# Altium PCB Breakout_12pin.PcbDoc
Units mm, origin at the board's own origin, x right, y up, seen from the top; angles counter-clockwise.
Board outline 55 x 25 mm, 2 copper layers (Top Layer, Bottom Layer), stack 1.571 mm thick; 7 components, 12 nets, 44 pads, 0 vias.
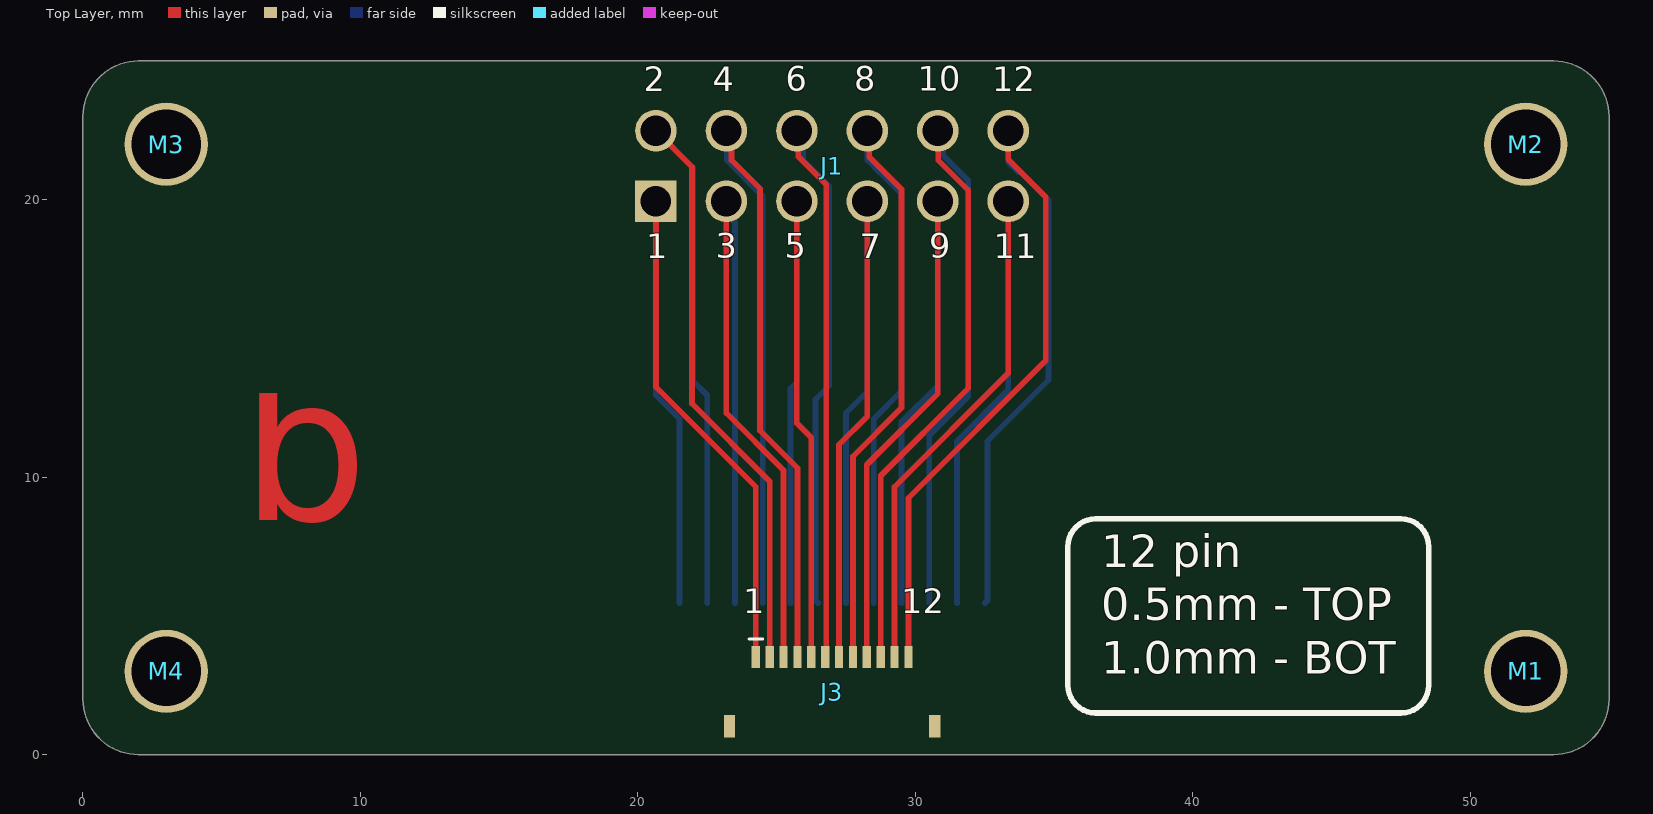
[diagram p0: Top Layer view]
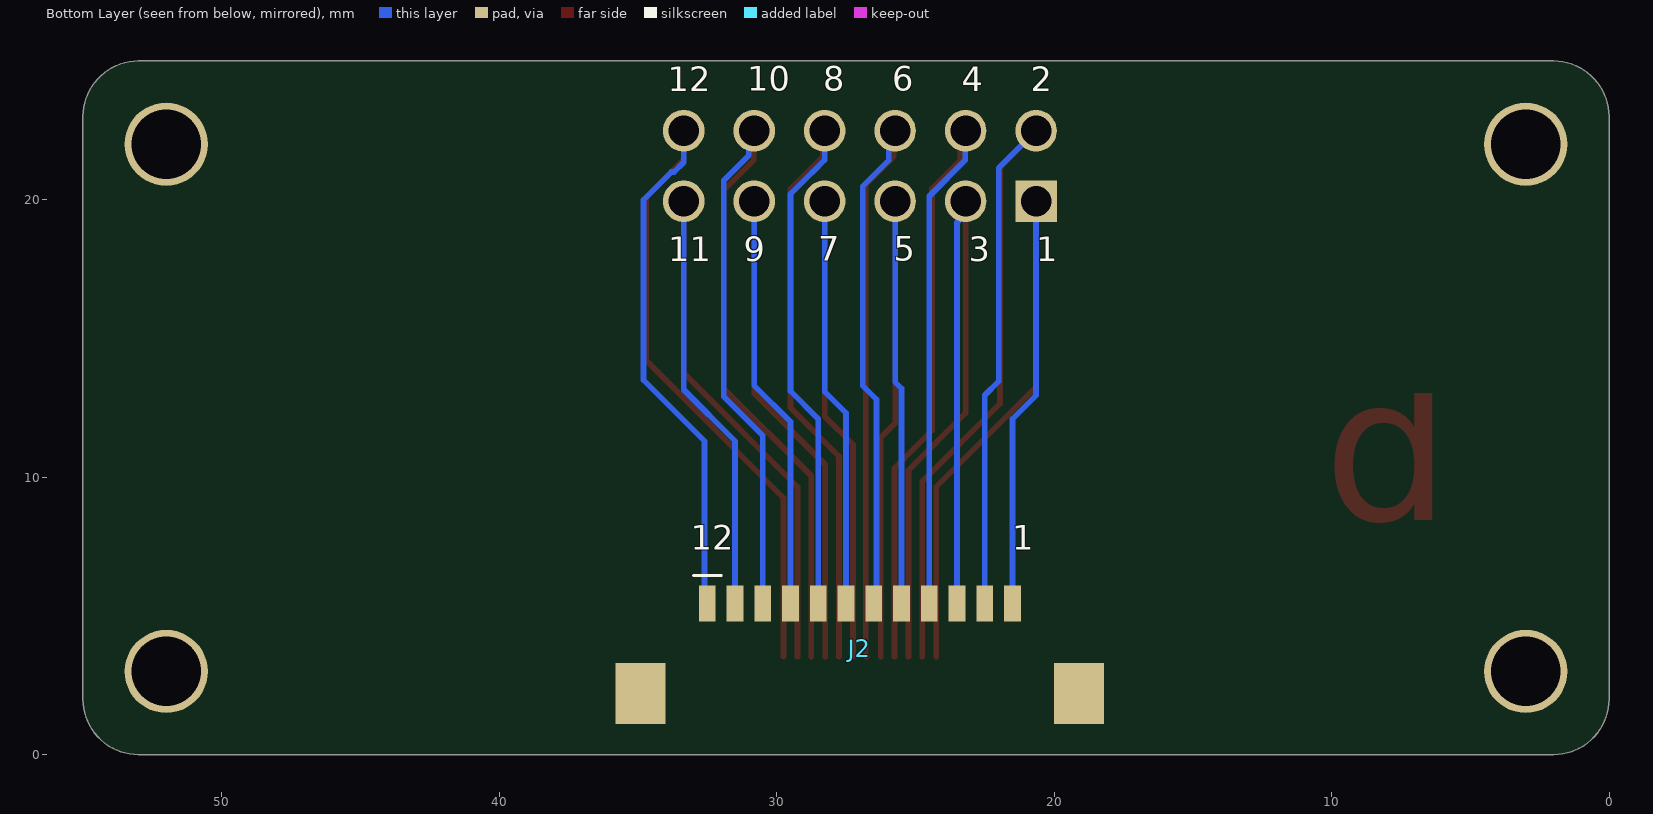
[diagram p1: Bottom Layer view, seen from below]

## Layer stack, top to bottom
Top Solder: solder mask 0.0102, Solder Resist, Dk 3.5
Top Layer: signal copper 0.0356
Dielectric 1: dielectric 1.5, FR-4, Dk 4.8
Bottom Layer: signal copper 0.0356
Bottom Solder: solder mask 0.0102, Solder Resist, Dk 3.5

## Board outline
2,0 cw(c2,2) 0,2 0,23 cw(c2,23) 2,25 53,25 cw(c53,23) 55,23 55,2 cw(c53,2) 53,0

## Design rules (kind name [scope] priority, off if disabled: settings)
Clearance [All] p1: gap=0.204 ignorepadtopadclearanceinfootprint=TRUE
DiffPairsRouting [All] p1: maxlimit=0.254 minlimit=0.064 mostfreqgap=0.127 toplayer_minwidth=0.178 toplayer_maxwidth=0.457 toplayer_prefwidth=0.457 bottomlayer_minwidth=0.178 bottomlayer_maxwidth=0.457 bottomlayer_prefwidth=0.457 impedanceprofiledriven=TRUE maxuncoupledlength=12.7
HoleSize [All] p1: absolutevalues=TRUE maxlimit=5 minlimit=0.153 maxpercent=80.000 minpercent=20.000
MinimumSolderMaskSliver [All] p1: minsoldermaskwidth=0.178
PolygonConnect [All] p1: connectstyle=Relief reliefconductorwidth=0.254 reliefentries=4 polygonreliefangle="90 Angle" airgapwidth=0.254
RoutingVias [All] p1: holewidth=0.305 width=0.61 viastyle="Through Hole" minholewidth=0.254 minwidth=0.508 maxholewidth=0.5 maxwidth=1.27
SolderMaskExpansion [All] p1: expansion=0.102 istentingtop=FALSE
Width [All] p1: maxlimit=25.4 minlimit=0.204 preferedwidth=0.254 minimp=50.000000 maximp=50.000000 favimp=50.000000
27 further rules are at their usual default settings.

## Components (designator, comment, footprint, x,y, rotation, side; value= is the part's Value field where it differs from the comment)
J1 "10129381-912001BLF" HDR-V-2X6-2.54MM 27,21.214 r0 top
J2 "XF3M(1)-1215-1B" CONN-FFC-H-12P-1MM 27,3.829 r180 bottom
J3 "FFC2B28-12-G" CONN-FFC-H-12P-0.5MM 27,2.272 r0 top
M1 "MTG_HOLE" MH_P_2.5MM 52,3 r90 top
M2 "MTG_HOLE" MH_P_2.5MM 52,22 r90 top
M3 "MTG_HOLE" MH_P_2.5MM 3,22 r90 top
M4 "MTG_HOLE" MH_P_2.5MM 3,3 r90 top

## Footprints (in the part's own frame and the unit in brackets; to place one, negate y for a bottom-side part, rotate by r counter-clockwise, add the part's x,y. Pads: shape width x height; smd on the part's side, far side on the other; paste and mask are expansions set on the pad)
CONN-FFC-H-12P-0.5MM [mm]
  rect 0.3x0.8 smd: 1(-2.75,1.25) 2(-2.25,1.25) 3(-1.75,1.25) 4(-1.25,1.25) 5(-0.75,1.25) 6(-0.25,1.25) 7(0.25,1.25) 8(0.75,1.25) 9(1.25,1.25) 10(1.75,1.25) 11(2.25,1.25) 12(2.75,1.25)
  rect 0.4x0.8 smd: ME1(-3.7,-1.25) ME2(3.7,-1.25)
  silkscreen extent -3,1.9 -2.5,1.9, body extent -4,-1.8 4,1.45, height 1.72
CONN-FFC-H-12P-1MM [mm]
  rect 0.6x1.3 smd: 1(-5.5,1.625) 2(-4.5,1.625) 3(-3.5,1.625) 4(-2.5,1.625) 5(-1.5,1.625) 6(-0.5,1.625) 7(0.5,1.625) 8(1.5,1.625) 9(2.5,1.625) 10(3.5,1.625) 11(4.5,1.625) 12(5.5,1.625)
  rect 1.8x2.2 smd: ME1(-7.9,-1.625) ME2(7.9,-1.625)
  silkscreen extent -6,2.63 -5,2.63, body extent -8.3,-3.67 8.3,2.73, height 2
HDR-V-2X6-2.54MM [mm]
  rect 1.5x1.5 hole 1.1: 1(-6.35,-1.27)
  round 1.5 hole 1.1: 2(-6.35,1.27) 3(-3.81,-1.27) 4(-3.81,1.27) 5(-1.27,-1.27) 6(-1.27,1.27) 7(1.27,-1.27) 8(1.27,1.27) 9(3.81,-1.27) 10(3.81,1.27) 11(6.35,-1.27) 12(6.35,1.27)
  body extent -7.62,-2.41 7.62,2.41, height 8.18
MH_P_2.5MM [mm]
  round 3 hole 2.5: 1(0,0)

## Part data
J1: library part HDR-V-2X6-M-2.54MM, "Conn Unshrouded Header HDR 12 POS 2.54mm Solder ST Thru-Hole Poly Bag", Manufacturer 1="Amphenol ICC / FCI", Category=Connectors, Manufacturer Part Number 1=10129381-912001BLF, Pricing="1=0.15, 10=0.1167, 25=0.1155, 50=0.1143, 100=0.0928, 500=0.0794 (USD)", RoHS=No, Stock=1680, Supplier="Arrow Electronics", Supplier Part Number=10129381-912001BLF
J2: library part CONN-FFC-H-12P-1MM, "FFC & FPC Connectors RotaryBackLock 1.0mm Dual Contact 12pin", Actuator Color=Black, Current Rating=500mA, Flammability Rating="UL94 V-0", Housing Color=Natural, Insulation Resistance=100MR, Manufacturer 1=Omron, Max Operating Temperature=85°C, Min Operating Temperature=-30°C, Package Quantity=1500, Supplier Part Number=OR1212CT-ND, Voltage Rating=50V, Actuator Material="Polymer,Liquid Crystal Polymer", Category="FFC / FPC", ComponentLink1Description=https://datasheet.ciiva.com/24242/xf3m-0813-272395-24242220.pdf?src-supplier=Mouser, ComponentLink1URL=https://datasheet.ciiva.com/24242/xf3m-0813-272395-24242220.pdf?src-supplier=Mouser, ComponentLink2Description=https://datasheet.ciiva.com/48563/en-xf3m-48563820.pdf?src-supplier=Avnet, ComponentLink2URL=https://datasheet.ciiva.com/48563/en-xf3m-48563820.pdf?src-supplier=Avnet, ComponentLink3Description=https://datasheet.ciiva.com/29758/xf3m-0813-29758631.pdf?src-supplier=Digi-Key, ComponentLink3URL=https://datasheet.ciiva.com/29758/xf3m-0813-29758631.pdf?src-supplier=Digi-Key, ComponentLink4Description=https://datasheet.ciiva.com/29758/xf3m-0813-29758637.pdf?src-supplier=Digi-Key, ComponentLink4URL=https://datasheet.ciiva.com/29758/xf3m-0813-29758637.pdf?src-supplier=Digi-Key, Contact Location=Dual, Contact Material="Copper Alloy", Contact Plating=Gold, Housing Material=Polymer, Manufacturer Part Number 1=XF3M(1)-1215-1B, Mating Cycles=20, Mounting Technology="Surface Mount", Number of Positions=12, Number of Rows=1, Orientation="Right Angle", Packaging="Tape and Reel", Pitch=1mm, Pricing="1=1.62, 10=1.406, 25=1.3464, 50=1.3166, 100=1.2567, 250=1.137, 500=1.04724 (USD)", RoHS=Yes, RoHS Compliant=Yes, Series=XF3M, Stock=181, Supplier=Digi-Key, Termination=Solder
J3: library part CONN-FFC-H-12P-0.5MM, "CONN, FPC, 12POS, 1ROW, 0.5MM, R/A SMT; Pitch Spacing: 0.5mm; No. of Contacts: 12Contacts; Gender: Receptacle;...", Manufacturer 1="Global Connector Technology", Supplier Part Number=90AJ6010, Category=Connectors, Manufacturer Part Number 1=FFC2B28-12-G, Pricing="1=0.534, 250=0.411, 500=0.37, 1000=0.337, 4000=0.337, 5000=0.309 (USD)", RoHS=No, Stock=3990, Supplier=Newark
M1 M2 M3 M4: "MTG HOLE PLATED VARIOUS SIZES"

## Nets (pads, with @x,y where several pads share a name; then routed paths per layer and width w, separated by ;. In a path a pad name is that pad's centre, name@x,y a point inside that pad or via, vN(x,y) a via of type N, cw(c..) or ccw(c..) an arc to the next point about the centre after c; other vN are vias at no path point)
1: J1.1 J2.12 J3.1 | length 32.8
  Top Layer w0.204: J1.1 20.65,13.25 24.25,9.65 J3.1
  Bottom Layer w0.204: J1.1 20.65,12.95 21.5,12.1 J2.12
2: J1.2 J2.11 J3.2 | length 38.5
  Top Layer w0.204: J1.2 21.95,21.184 21.95,12.65 24.75,9.85 J3.2
  Bottom Layer w0.204: J1.2 22,21.134 22,13.452 22.5,12.952 J2.11
3: J1.3 J2.10 J3.3 | length 31.9
  Top Layer w0.204: J1.3 23.19,12.31 25.25,10.25 J3.3
  Bottom Layer w0.204: J1.3 23.438,19.696 23.438,19.239 23.5,19.176 J2.10
4: J1.4 J2.9 J3.4 | length 37.6
  Top Layer w0.204: J1.4 23.372,22.302 23.372,21.428 24.4,20.4 24.4,11.677 25.75,10.327 J3.4
  Bottom Layer w0.204: J1.4 23.199,22.475 23.199,21.428 24.5,20.127 J2.9
5: J1.5 J2.8 J3.5 | length 31.2
  Top Layer w0.204: J1.5 25.73,11.945 26.25,11.425 J3.5
  Bottom Layer w0.204: J2.8 25.5,13.2 25.73,13.43 J1.5
6: J1.6 J2.7 J3.6 | length 37.2
  Top Layer w0.204: J1.6 25.784,22.43 25.784,21.547 26.786,20.545 26.786,3.558 J3.6
  Bottom Layer w0.204: J1.6 25.954,22.26 25.954,21.428 26.9,20.482 26.9,13.3 26.4,12.8 26.4,5.554 J2.7
7: J1.7 J2.6 J3.7 | length 31.7
  Top Layer w0.204: J3.7 27.25,11.175 28.27,12.195 J1.7
  Bottom Layer w0.204: J2.6 27.5,12.314 28.27,13.084 J1.7
8: J1.8 J2.5 J3.8 | length 38.2
  Top Layer w0.204: J3.8 27.75,10.75 29.5,12.5 29.5,20.379 28.332,21.547 28.332,22.422 J1.8
  Bottom Layer w0.204: J1.8 28.27,21.43 28.7,21 28.707,21 29.5,20.207 29.5,13.1 28.5,12.1 J2.5
9: J1.9 J2.4 J3.9 | length 32.5
  Top Layer w0.204: J3.9 28.25,10.45 30.81,13.01 J1.9
  Bottom Layer w0.204: J2.4 29.5,12 30.81,13.31 J1.9
10: J1.10 J2.3 J3.10 | length 38.8
  Top Layer w0.204: J3.10 28.75,10.05 31.9,13.2 31.9,20.347 30.819,21.428 30.819,22.475 J1.10
  Bottom Layer w0.204: J2.3 30.5,11.5 31.9,12.9 31.9,20.7 31.006,21.594 31.006,22.288 J1.10
11: J1.11 J2.2 J3.11 | length 33.4
  Top Layer w0.204: J3.11 29.25,9.65 33.35,13.75 J1.11
  Bottom Layer w0.204: J2.2 31.5,11.3 33.35,13.15 J1.11
12: J1.12 J2.1 J3.12 | length 40.2
  Top Layer w0.204: J3.12 29.75,9.25 34.7,14.2 34.7,20.1 33.35,21.45 J1.12
  Bottom Layer w0.204: J2.1 32.6,5.554 32.6,11.3 34.8,13.5 34.8,19.987 33.787,21 33.7,21 33.35,21.35 J1.12
pads on no net: J2.ME1 J2.ME2 J3.ME1 J3.ME2 M1.1 M2.1 M3.1 M4.1

## Other copper
Top Layer:
  text "b" at 5.7,5.8 h13.97

## Silkscreen, mask and mechanical layers (free items; w line width, h text height)
Top Overlay:
  lines w0.2: 35.5,2.5 ccw(c36.5,2.5) 36.5,1.5 47.5,1.5 ccw(c47.5,2.5) 48.5,2.5 48.5,7.5 ccw(c47.5,7.5) 47.5,8.5 36.5,8.5 ccw(c36.5,7.5) 35.5,7.5 35.5,2.5 ; 35.5,2.5 35.5,2.5
  text "6" at 25.334,23.645 h1.5
  text "8" at 27.792,23.645 h1.5
  text "10" at 30.092,23.645 h1.5
  text "2" at 20.217,23.629 h1.5
  text "4" at 22.697,23.629 h1.5
  text "12" at 32.778,23.629 h1.5
  text "3" at 22.8,17.616 h1.5
  text "5" at 25.3,17.616 h1.5
  text "9" at 30.5,17.616 h1.5
  text "1" at 20.3,17.6 h1.5
  text "7" at 28,17.6 h1.5
  text "11" at 32.828,17.6 h1.5
  text "12 pin" at 36.7,6.356 h2
  text "1" at 23.8,4.8 h1.5
  text "12" at 29.5,4.8 h1.5
  text "0.5mm - TOP" at 36.7,4.438 h2
  text "1.0mm - BOT" at 36.7,2.521 h2
  text "c" at 3.169,-11.943 h50
Bottom Overlay:
  text "6" at 25.832,23.645 h1.5
  text "8" at 28.314,23.645 h1.5
  text "10" at 31.054,23.645 h1.5
  text "2" at 20.837,23.629 h1.5
  text "4" at 23.319,23.629 h1.5
  text "12" at 33.923,23.629 h1.5
  text "5" at 25.783,17.516 h1.5
  text "7" at 28.496,17.516 h1.5
  text "1" at 20.65,17.5 h1.5
  text "3" at 23.079,17.5 h1.5
  text "9" at 31.193,17.5 h1.5
  text "11" at 33.9,17.5 h1.5
  text "1" at 21.5,7.1 h1.5
  text "12" at 33.1,7.1 h1.5
Board Outline:
  lines w0.1: 27,25 27.5,25 ; 0,2 ccw(c2,2) 2,0 53,0 ccw(c53,2) 55,2 55,23 ccw(c53,23) 53,25 2,25 ccw(c2,23) 0,23 0,2